# Altium PCB 4 Layers.PcbDoc
Units mm, origin at the board's own origin, x right, y up, seen from the top; angles counter-clockwise.
Board outline 160 x 100 mm, 4 copper layers (Top Layer, Int1, Int2, Bottom Layer), stack 1.912 mm thick; 12 components, 26 nets, 46 pads, 0 vias.

## Layer stack, top to bottom
Top Solder: solder mask 0.0254, SM-001, Dk 3.5
Top Layer: signal copper 0.018
Dielectric 1: prepreg 0.127, FR4, Dk 4.2
Dielectric 2: prepreg 0.193, FR4, Dk 4.6
Int1: plane copper 0.018
Dielectric 3: core 1.2, FR4, Dk 4.6
Int2: plane copper 0.018
Dielectric 4: prepreg 0.193, FR4, Dk 4.6
Dielectric 5: prepreg 0.127, FR4, Dk 4.2
Bottom Layer: signal copper 0.018
Bottom Solder: solder mask 0.0254, SM-001, Dk 3.5

## Board outline
0,0 0,100 160,100 160,0

## Design rules (kind name [scope] priority, off if disabled: settings)
Clearance [All] p1: gap=0.254 ignorepadtopadclearanceinfootprint=FALSE except(0: Arc-Hole Track-Hole SMDPad-Hole THPad-Hole Via-Hole Fill-Hole Poly-Hole Region-Hole Text-Hole)
PlaneClearance [All] p1: clearance=0.508
PlaneConnect [All] p1: planeconnectstyle=Relief reliefexpansion=0.508 reliefentries=4 reliefconductorwidth=0.254 reliefairgap=0.254
PolygonConnect [All] p1: connectstyle=Relief reliefconductorwidth=0.254 reliefentries=4 polygonreliefangle="90 Angle" airgapwidth=0.254
RoomDefinition Блок4 [InComponentClass('Блок4')] p1: confinementstyle=ConfineIn formatcopy=TRUE lockcomponents=FALSE outline -31.25,-30 19.55,-30 19.55,-4.6 -31.25,-4.6
RoutingVias [All] p1: holewidth=0.711 width=1.27 viastyle="Through Hole" minholewidth=0.711 minwidth=1.27 maxholewidth=0.711 maxwidth=1.27
SolderMaskExpansion [All] p1: expansion=0.102 istentingtop=FALSE
Width [All] p1: maxlimit=0.254 minlimit=0.254 preferedwidth=0.254
28 further rules are at their usual default settings.

## Classes and differential pairs
component class Структура: J1 P3
component class Блок4: BH1 RT1
component class Блок1: D4 D5 D6 J2 R1 R2 X1

## Components (designator, comment, footprint, x,y, rotation, side; value= is the part's Value field where it differs from the comment)
C3 "Cap Semi" C1206 191.25,-640 r0 top value=1uF
C4 "Cap Semi" C1206 196.25,-640 r0 top value=1uF
C5 "Cap Semi" C1206 176.25,-640 r0 top value=10uF
C6 "Cap Semi" C1206 181.25,-640 r0 top value=10uF
C7 "Cap Semi" C1206 163.75,-640 r0 top value=560pF
CB1 "Circuit Breaker" SPST-2 168.75,-642.5 r90 top
D2 "LED2" 3.2X1.6X1.1 186.25,-642.5 r90 top
D3 "LED2" 3.2X1.6X1.1 201.25,-642.5 r90 top
D4 "LED2" 3.2X1.6X1.1 163.75,-657.5 r90 top
D5 "LED2" 3.2X1.6X1.1 163.75,2509.975 r90 top
J1 "Header 15" HDR1X15 163.75,-632.5 r90 top
X1 "DC-041-065A" DC-041-065A 2508.725,-2569.975 r0 top

## Footprints (in the part's own frame and the unit in brackets; to place one, negate y for a bottom-side part, rotate by r counter-clockwise, add the part's x,y. Pads: shape width x height; smd on the part's side, far side on the other; paste and mask are expansions set on the pad)
3.2X1.6X1.1 [mm] "SMT LED; 2 Flat Leads"
  rect 1.5x1.5 smd: 1(-1.75,0) 2(1.75,0)
  silkscreen extent -2.9,-1.15 3.2,1.15
C1206 [mm] "Chip Capacitor, Body 3.2x1.6mm, IPC High Density"
  rect 1.1x1.7 smd: 1(-1.35,0) 2(1.35,0)
  silkscreen extent -0.4,-0.75 0.4,0.75, body extent -1.7,-0.9 1.7,0.9, height 1.3
DC-041-065A [mm] "DC-041-065A"
  rect 1.2x2 smd: 1(-0.9,-3.002)
  rect 2.5x2 smd: 2(3.2,-0.9)
  rect 2x2 smd: 3(-3.2,-1.8) 4(3.2,3.7) 5(-3.2,3.7)
  round 1.4 hole 1.4 unplated: ""(0,0)
  round 1.7 hole 1.7 unplated: ""(0,5.5)
  silkscreen extent -3.25,-2.45 3.25,7.05, body extent -2550,-2552 -1270,-1266
HDR1X15 [mm] "Connector; Header; 15 Position"
  rect 1.5x1.5 hole 0.9: 1(0,0)
  round 1.5 hole 0.9: 2(2.54,0) 3(5.08,0) 4(7.62,0) 5(10.16,0) 6(12.7,0) 7(15.24,0) 8(17.78,0) 9(20.32,0) 10(22.86,0) 11(25.4,0) 12(27.94,0) 13(30.48,0) 14(33.02,0) 15(35.56,0)
  silkscreen extent -1.27,-1.27 36.83,1.27
SPST-2 [mm] "Switch; 2 Leads"
  rect 1.85x1.85 hole 1.1: 1(-2.54,0)
  round 1.85 hole 1.1: 2(2.54,0)
  silkscreen extent -4.89,-1.27 4.28,1.27

## Part data
C3 C4 C5 C6 C7: "Capacitor (Semiconductor SIM Model)", LatestRevisionDate=29-May-2009, LatestRevisionNote="IPC-7351 Footprint Added.", PackageDescription="Chip Capacitor", PackageReference=C1206, Published=8-Jun-2000, Publisher="Altium Limited"
D2 D3 D4 D5: "Typical RED, GREEN, YELLOW, AMBER GaAs LED", LatestRevisionDate=17-Jul-2002, LatestRevisionNote="Re-released for DXP Platform.", PackageDescription="SM LED; 2 Flat Leads", PackageReference=3.2X1.6X1.1, PackageVersion=Feb-2002, Published=8-Jun-2000, Publisher="Altium Limited"
  D2: Parameter 1="Идет заряд аккумулятора"
  D3: Parameter 1="Питание находится в норме"
  D4 D5: Parameter 1="Подано питание в разъем"
J1: "Header, 15-Pin", LatestRevisionDate=17-Jul-2002, LatestRevisionNote="Re-released for DXP Platform.", Publisher="Altium Limited"
X1: "Surface Mount DC Power Receptacle 0.65mm -20℃~+70℃ 2.6mm 500mA 30V SMD AC/DC Power Connectors ROHS", BOM_JLCPCB Part Class="Extended Part", BOM_Manufacturer="Rectangular Connectors - Contacts", lcsc.com=имеется, BOM_Manufacturer Part=DC-041-065A, BOM_Supplier=LCSC, BOM_Supplier Part=C192728, Contributor=LCSC, Inside Contact Diameter=0.65mm, Outside Contact Diameter=2.6mm, Parameter 1=https://lcsc.com/product-detail/AC-DC-Power-Connectors_Korean-Hroparts-Elec-DC-041-065A_C192728.html, spicePre=D, spiceSymbolName=DC-041
CB1: LatestRevisionDate=17-Jul-2002, LatestRevisionNote="Re-released for DXP Platform.", PackageDescription="Switch; 2 Leads", PackageReference=SPST-2, Published=24-Mar-1999, Publisher="Altium Limited"

## Free pads (board coordinates)
  round 3 hole 3.2 unplated: MTH1(5,5) MTH2(5,95) MTH3(155,95) MTH4(155,5)

## Nets (pads, with @x,y where several pads share a name; then routed paths per layer and width w, separated by ;. In a path a pad name is that pad's centre, name@x,y a point inside that pad or via, vN(x,y) a via of type N, cw(c..) or ccw(c..) an arc to the next point about the centre after c; other vN are vias at no path point)
GND: C3.1 C4.1 C5.1 C6.1 C7.1 X1.2 X1.3 X1.4 X1.5
NetBH1_1: 
NetC3_2: C3.2 C4.2 D2.1 D3.1
NetC5_2: C5.2 C6.2
NetC7_2: C7.2
NetD2_2: D2.2
NetD3_2: D3.2
NetD4_1: D4.1 X1.1
NetD4_2: D4.2
NetD5_1: D5.1
NetD5_2: D5.2
NetD6_1: 
NetJ1_6: J1.6 J1.7 J1.8
NetP3_1: 
NetP3_2: 
NetP3_3: 
NetP3_4: 
NetP3_5: 
NetP3_6: 
NetQ4_1: 
NetQ4_3: 
NetR11_1: 
NetR15_2: 
NetR16_1: 
NetR17_2: 
NetRT1_2: 
pads on no net: CB1.1 CB1.2 J1.1 J1.2 J1.3 J1.4 J1.5 J1.9 J1.10 J1.11 J1.12 J1.13 J1.14 J1.15 X1.

## Polygon pours and split planes (outlines as drawn)
no net on Int1 (split plane): 159.49,0.51 0.51,0.51 0.51,99.49 159.49,99.49
no net on Int2 (split plane): 159.49,0.51 0.51,0.51 0.51,99.49 159.49,99.49

## Keep-outs
Keep-Out Layer:
  circle w0.25: c5,95 r4.5
  circle w0.25: c155,95 r4.5
  circle w0.25: c155,5 r4.5
  circle w0.25: c5,5 r4.5
  lines w0.254: 2.5,10 2.5,90 10,90 10,97.5 150,97.5 150,90 157.5,90 157.5,10 150,10 150,2.5 10,2.5 10,10 2.5,10

## Silkscreen, mask and mechanical layers (free items; w line width, h text height)
Board Outline:
  the board outline again, w0.25

## Dimensions
155,95 to 171.075,107.95 on Board Dimensions
160,100 to 160,0 on Board Dimensions
0,100 to 160,100 on Board Dimensions